# Altium PCB ee453_pcb_Schulz.PcbDoc (part 2 of 2)
Units mil, origin at the board's own origin, x right, y up, seen from the top; angles counter-clockwise.
Board outline 6000 x 5000 mil, 4 copper layers (Top Layer, PWR, GND, Bottom Layer); 112 components, 58 nets, 388 pads, 33 vias.
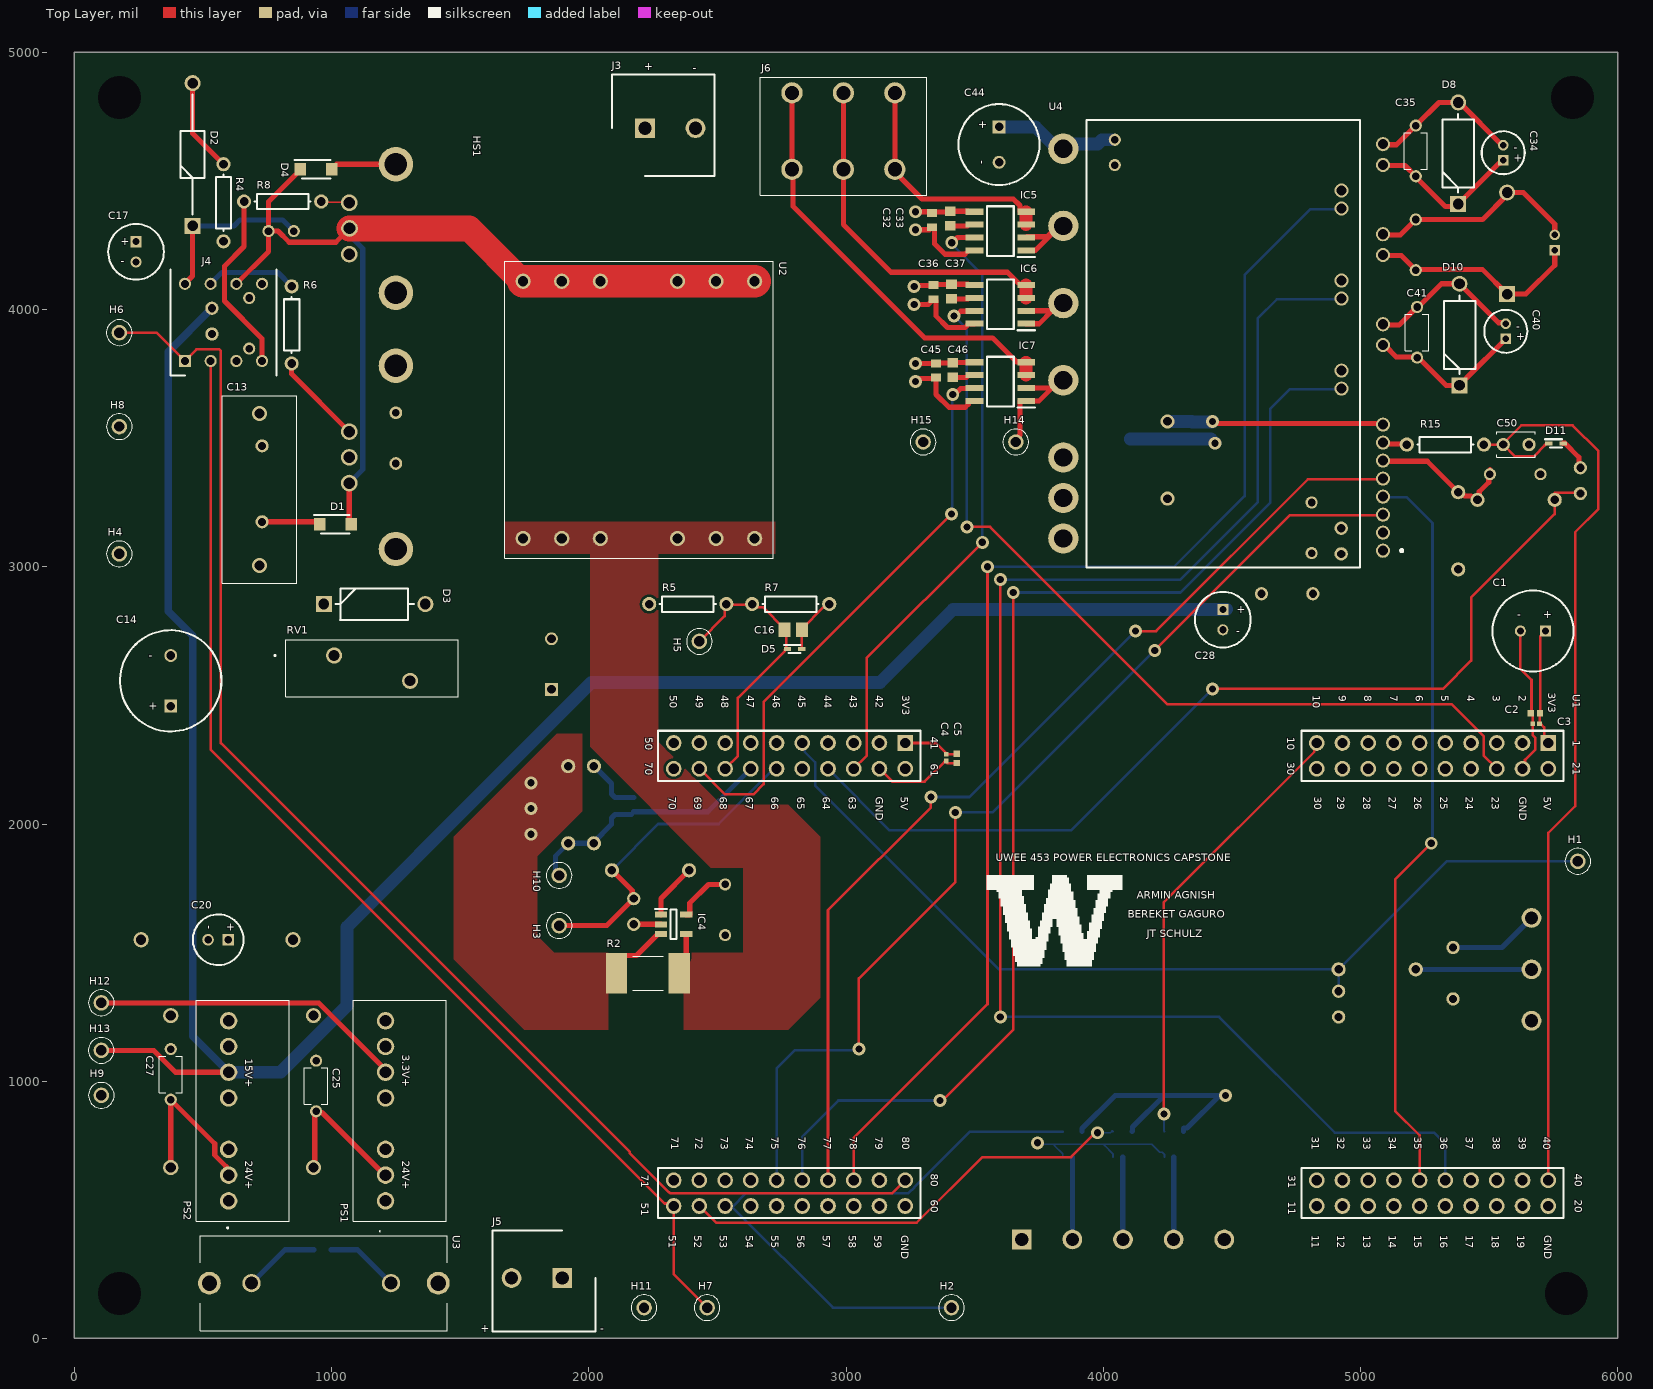
[diagram p0: Top Layer view]

## Via types
v1: diameter 50, hole 28, Top Layer to Bottom Layer, 33 vias

## Nets (pads, with @x,y where several pads share a name; then routed paths per layer and width w, separated by ;. In a path a pad name is that pad's centre, name@x,y a point inside that pad or via, vN(x,y) a via of type N, cw(c..) or ccw(c..) an arc to the next point about the centre after c; other vN are vias at no path point) (continued)
NetR15_1: (continued)
  Top Layer w7: U4.7 U4.7@5090.02,3480.02 ; R15.1@5177.5,3477.5 R15.1
  Top Layer w20: U4.7@5083.76,3477.5 R15.1@5177.5,3477.5
SD: H7.1 J4.2 U1.51 | length 4494.1
  Top Layer w10: J4.2 530,2290 2295.32,524.68 2320.32,524.68 U1.51 2330,250 H7.1
THR: C6.1 H1.1 R1.1 U1.45 | length 3705.8
  Bottom Layer w10: U1.45 2839.68,2305.32 2839.68,2280.32 2880,2240 2880,2150 3595,1435 R1.1 ; C6.1 R1.1 ; H1.1 5335,1855 R1.1
VTS: C50.1 D11.1 R15.2 U1.40 | length 3638.1
  Top Layer w10: R15.2 C50.1 ; 5717.44,3475 5717.44,3472.52 5674.01,3429.09 5600.91,3429.09 C50.1 ; U1.40 5730,1965 5835,2070 5835,3135 5925,3225 5925,3450 5825,3550 5625,3550 5555,3480 C50.1
pads on no net: H15.1 IC1.1 IC2.1 IC3.1 J2.1 PS1.3 PS1.5 PS1.8 PS2.3 PS2.5 PS2.8 U1.2 U1.3 U1.4 U1.5 U1.6 U1.7 U1.8 U1.9 U1.11 U1.12 U1.13 U1.14 U1.15 U1.16 U1.17 U1.18 U1.19 U1.21 U1.24 U1.25 U1.26 U1.27 U1.28 U1.29 U1.30 U1.31 U1.32 U1.33 U1.34 U1.37 U1.38 U1.39 U1.42 U1.43 U1.44 U1.46 U1.47 U1.48 U1.49 U1.50 U1.54 U1.55 U1.56 U1.57 U1.58 U1.59 U1.61 U1.65 U1.70 U1.71 U1.72 U1.73 U1.74 U1.79

## Polygon pours and split planes (outlines as drawn)
15V on PWR "15V_L02_P017" (solid, pour order 17): 5130,3095 5175,3050 5175,2935 4945,2705 4330,2705 4330,2902.5 4527.5,3100 4730,3100 4730,4550 4780,4600 4965,4600 5015,4550 5015,3145 5065,3095
48V on PWR "48V_L02_P022" (solid, pour order 22): 4150,4500 4095,4445 3245,4445 3165,4365 3156.16,4365 3156.16,2840 3155,2838.46 2915,2598.46 2250.39,2597.5 2000.39,2347.5 152.5,2347.5 50.39,2450 50.39,3467.5 225.39,3642.5 1305.39,3642.5 1660.39,3997.5 1660.39,4662.5 1945.39,4947.5 3975,4947.5 4150,4772.5
3.3V on PWR "3.3V_L02_P011" (solid, pour order 11): 2400,1300 2450,1350 2450,2475 2500,2525 3175,2525 3225,2575 3225,4320 3250,4345 3605,4345 3735,4215 3735,2575 3785,2525 5225,2525 5275,2575 5275,3025 5325,3075 5900,3075 5945,3030 5945,745 5900,700 2500,700 2450,750 2450,925 2400,975 1155,975 1100,1030 1100,1245 1155,1300
15V on PWR "15V_L02_P028" (solid, pour order 28): 225,4325 419,4325 419,4284 501,4284 501,4325 680,4325 780,4225 780,4095 640,3955 335,3955 175,4115 175,4275
no net on PWR "NONET_L02_P029" (solid, pour order 29): 830,4250
24V on PWR "24V_L02_P010" (solid, pour order 10): 1045,1245 1125,1325 2075,1325 2225,1475 2225,2165 2220,2170 2125,2265 2115,2275 1695,2275 1575,2155 1575,1750 320,1750 225,1655 225,1095 180,1050 70,1050 25,1005 25,355 80,300 180,300 380,100 1235,100 1300,165 1300,675 1045,930
no net on PWR "NONET_L02_P019" (solid, pour order 19): 50,3630
no net on PWR "NONET_L02_P015" (solid, pour order 15): 2450,700
no net on PWR "NONET_L02_P013" (solid, pour order 13): 1145,975
no net on PWR "NONET_L02_P012" (solid, pour order 12): 2460,700
no net on PWR "NONET_L02_P007" (solid, pour order 7): 655,780
no net on PWR "NONET_L02_P005" (solid, pour order 5): 25,1050
no net on PWR "NONET_L02_P004" (solid, pour order 4): 25,1050
no net on PWR "NONET_L02_P003" (solid, pour order 3): 50,950
no net on PWR "NONET_L02_P002" (solid, pour order 2): 40,715
24VIN on PWR "24VIN_L02_P001" (solid, pour order 1): 1325,150 1375,100 1725,100 1775,150 1775,275 1725,325 1375,325 1325,275
NetIC4_4 on Top Layer "Top Layer-NetIC4_4" (solid, pour order 48): 2370,1200 2775,1200 2900,1325 2900,1950 2775,2075 2515,2075 2270,2320 2270,3050 2725,3050 2725,3175 1675,3175 1675,3050 2005,3050 2005,2300 2475,1830 2600,1830 2600,1500 2370,1500
NetIC4_4 on Top Layer "NETIC4_4_L01_P045" (solid, pour order 45): 2520,1255
no net on Top Layer "NONET_L01_P043" (solid, pour order 43): 2040,1170
24V on Top Layer "24V_L01_P041" (solid, pour order 41): 2075,1200 1750,1200 1475,1475 1475,1950 1875,2350 1975,2350 1975,2050 1800,1875 1800,1565 1865,1500 2075,1500
no net on Top Layer "NONET_L01_P040" (solid, pour order 40): 1875,1920
no net on Top Layer "NONET_L01_P038" (solid, pour order 38): 2055,880
24V on Top Layer "24V_L01_P035" (solid, pour order 35): 1785,1505
GND on Bottom Layer "GND_L04_P050" (solid, pour order 50): 3955,3360 4145,3360 4145,4530 4085,4590 4065,4590 3940,4590 3940,3530 3955,3515
NetR11_2 on Bottom Layer "NETR11_2_L04_P049" (solid, pour order 49): 3750,3500 3925,3500 3925,3350 4300,3350 4300,3225 4094.87,3025 3750,3025
GND on GND "GND_L03_P000" (solid, pour order 0): 20,4980 5980,4980 5980,20 20,20

## Other copper
GND:
  pour cut-out: 4180,4870 4070,4980 4535,4980 4420,4865 4420,4490 4365,4430 4350,4430 4200,4430 3255,4430 3225,4400 3225,2740 2120,1635 2120,635 2505,250 2505,20 2310,20 2310,155 1810,655 1810,1605 3005,2800 3005,4315 3150,4460 4090,4460 4175,4545 4180,4545
  pour cut-out: 5980,4980 5980,4537.13 5537.13,4980
  pour cut-out: 20,4980 462.87,4980 20,4537.13
  pour cut-out: 20,20 20,462.87 462.87,20
  pour cut-out: 5512.13,20 5980,487.87 5980,20
PWR:
  pour cut-out: 597.24,4091.22

## Silkscreen, mask and mechanical layers (free items; w line width, h text height)
Top Overlay:
  region: 329 vertices and 0 holes, not listed, extent 3546.51,1447.9 4074.51,1799.9
  text "+" at 2215,4930 h30
  text "-" at 2405,4925 h30
  text "+" at 3545,4700 h30 r90
  text "-" at 5595,4615 h30
  text "+" at 5595,4575 h30
  text "-" at 3540,4565 h30 r90
  text "+" at 180,4250 h30
  text "-" at 180,4175 h30
  text "-" at 5605,3920 h30
  text "+" at 5605,3880 h30
  text "+" at 4520,2820 h30
  text "-" at 5610,2800 h30
  text "+" at 5710,2800 h30
  text "-" at 4516.39,2735.38 h30
  text "-" at 290,2640 h30
  text "+" at 290,2445 h30
  text "UWEE 453 POWER ELECTRONICS CAPSTONE" at 3582.67,1855 h30
  text "ARMIN AGNISH" at 4130.06,1710 h30
  text "BEREKET GAGURO" at 4095.07,1635 h30
  text "-" at 535,1590 h30 r90
  text "+" at 590,1585 h30
  text "JT SCHULZ" at 4170.04,1560 h30
  text "3.3V+" at 1275,1102.48 h30 r270
  text "15V+" at 665,1087.48 h30 r270
  text "24V+" at 665,689.98 h30 r270
  text "24V+" at 1275,689.98 h30 r270
  text "+" at 1580,25 h30
  text "-" at 2045,25 h30
Bottom Overlay:
  text "-" at 5795,4265 h30
  text "+" at 5795,4225 h30
  text "-" at 1765,2705 h30
  text "+" at 1765,2510 h30
  text "+" at 5565,1620 h30
  text "-" at 5585,1250 h30 r180
  text "B" at 4090,90 h30 r180
  text "C" at 4280,90 h30 r180
  text "A" at 3870,60 h30
  text "-" at 4460,60 h30

## Text inside footprints (layer, text, board x,y; h text height)
U1: Top Overlay "78" at 3013.66,785.15 h30 r270; Top Overlay "79" at 3113.66,785.15 h30 r270; Top Overlay "39" at 5615,785.15 h30 r270; Top Overlay "38" at 5515,785.15 h30 r270; Top Overlay "27" at 5110,2106.57 h30 r270; Top Overlay "19" at 5610,401.85 h30 r270; Top Overlay "59" at 3110,401.85 h30 r270; Top Overlay "11" at 4810,401.85 h30 r270; Top Overlay "12" at 4910,401.85 h30 r270; Top Overlay "13" at 5010,401.85 h30 r270; Top Overlay "15" at 5210,401.85 h30 r270; Top Overlay "16" at 5310,401.85 h30 r270; Top Overlay "17" at 5410,401.85 h30 r270; Top Overlay "18" at 5510,401.85 h30 r270; Top Overlay "31" at 4810,785.15 h30 r270; Top Overlay "32" at 4910,785.15 h30 r270; Top Overlay "33" at 5010,785.15 h30 r270; Top Overlay "34" at 5110,785.15 h30 r270; Top Overlay "35" at 5210,785.15 h30 r270; Top Overlay "36" at 5310,785.15 h30 r270; Top Overlay "37" at 5410,785.15 h30 r270; Top Overlay "14" at 5110,401.85 h30 r270; Top Overlay "51" at 2310,401.85 h30 r270; Top Overlay "52" at 2410,401.85 h30 r270; Top Overlay "53" at 2510,401.85 h30 r270; Top Overlay "55" at 2710,401.85 h30 r270; Top Overlay "56" at 2810,401.85 h30 r270; Top Overlay "57" at 2910,401.85 h30 r270; Top Overlay "58" at 3010,401.85 h30 r270; Top Overlay "80" at 3218.66,785.15 h30 r270; Top Overlay "72" at 2413.66,785.15 h30 r270; Top Overlay "73" at 2513.66,785.15 h30 r270; Top Overlay "74" at 2610,785.15 h30 r270; Top Overlay "75" at 2710,785.15 h30 r270; Top Overlay "76" at 2813.66,785.15 h30 r270; Top Overlay "77" at 2913.66,785.15 h30 r270; Top Overlay "54" at 2610,401.85 h30 r270; Top Overlay "67" at 2610,2106.57 h30 r270; Top Overlay "42" at 3115,2499.95 h30 r270; Top Overlay "43" at 3015,2499.95 h30 r270; Top Overlay "44" at 2915,2499.95 h30 r270; Top Overlay "45" at 2815,2499.95 h30 r270; Top Overlay "46" at 2715,2499.95 h30 r270; Top Overlay "47" at 2615,2499.95 h30 r270; Top Overlay "48" at 2515,2499.95 h30 r270; Top Overlay "49" at 2415,2499.95 h30 r270; Top Overlay "50" at 2315,2499.95 h30 r270; Top Overlay "63" at 3010,2106.57 h30 r270; Top Overlay "64" at 2910,2106.57 h30 r270; Top Overlay "65" at 2810,2106.57 h30 r270; Top Overlay "66" at 2710,2106.57 h30 r270; Top Overlay "68" at 2510,2106.57 h30 r270; Top Overlay "69" at 2410,2106.57 h30 r270; Top Overlay "70" at 2310,2106.57 h30 r270; Top Overlay "30" at 4820,2106.57 h30 r270; Top Overlay "29" at 4910,2106.57 h30 r270; Top Overlay "28" at 5010,2106.57 h30 r270; Top Overlay "26" at 5210,2106.57 h30 r270; Top Overlay "25" at 5310,2106.57 h30 r270; Top Overlay "24" at 5410,2106.57 h30 r270; Top Overlay "23" at 5510,2106.57 h30 r270; Top Overlay "10" at 4815,2499.95 h30 r270; Top Overlay "9" at 4915,2499.95 h30 r270; Top Overlay "8" at 5015,2499.95 h30 r270; Top Overlay "7" at 5115,2499.95 h30 r270; Top Overlay "6" at 5215,2499.95 h30 r270; Top Overlay "5" at 5315,2499.95 h30 r270; Top Overlay "4" at 5415,2499.95 h30 r270; Top Overlay "3" at 5515,2499.95 h30 r270; Top Overlay "2" at 5615,2499.95 h30 r270; Top Overlay "41" at 3330,2340 h30 r270; Top Overlay "61" at 3330,2235 h30 r270; Top Overlay "50" at 2220,2337 h30 r270; Top Overlay "70" at 2220,2240 h30 r270; Top Overlay "60" at 3330,540 h30 r270; Top Overlay "80" at 3330,640 h30 r270; Top Overlay "71" at 2320,785.15 h30 r270; Top Overlay "10" at 4715,2337 h30 r270; Top Overlay "1" at 5825,2325 h30 r270; Top Overlay "30" at 4715,2240 h30 r270; Top Overlay "21" at 5825,2240 h30 r270; Top Overlay "20" at 5833.05,540 h30 r270; Top Overlay "11" at 4720,532 h30 r270; Top Overlay "31" at 4720,635 h30 r270; Top Overlay "40" at 5833.05,640 h30 r270; Top Overlay "GND" at 5715,401.85 h30 r270; Top Overlay "GND" at 5616.45,2106.57 h30 r270; Top Overlay "5V" at 5713.05,2106.57 h30 r270; Top Overlay "3V3" at 5730,2510 h30 r270; Top Overlay "5V" at 3213.05,2106.57 h30 r270; Top Overlay "GND" at 3116.45,2106.57 h30 r270; Top Overlay "3V3" at 3218.05,2499.95 h30 r270; Top Overlay "GND" at 3215,401.85 h30 r270; Top Overlay "40" at 5710,785.15 h30 r270; Top Overlay "71" at 2203.46,637.38 h30 r270; Top Overlay "51" at 2205,526.85 h30 r270; Bottom Overlay "AB2/G1I" at 5120,1953.46 h25 r270; Bottom Overlay "AC0/G3I" at 5015,1949.29 h25 r270; Bottom Overlay "AA9/G5I" at 4920,1949.29 h25 r270; Bottom Overlay "AA1/DACB" at 4760,1925 h30 r270; Bottom Overlay "AA8/G6O" at 2515,2394.33 h25 r270; Bottom Overlay "AA4/G2O" at 2715,2394.33 h25 r270; Bottom Overlay "AB4/G4O" at 2820,2394.33 h25 r270; Bottom Overlay "AC4" at 5015,2419.97 h30 r270; Bottom Overlay "AB3" at 5215,2419.97 h30 r270; Bottom Overlay "NC" at 5315,2449.96 h30 r270; Bottom Overlay "AA5" at 5510,2026.6 h30 r270; Bottom Overlay "AB0" at 5410,2026.6 h30 r270; Bottom Overlay "AC2" at 5310,2026.6 h30 r270; Bottom Overlay "AB1" at 5210,2036.6 h30 r270; Bottom Overlay "PGAGND" at 5610,2390 h30 r270; Bottom Overlay "P13" at 5515,2424.97 h30 r270; Bottom Overlay "P40" at 5415,2419.97 h30 r270; Bottom Overlay "P56" at 5115,2419.97 h30 r270; Bottom Overlay "P37" at 4915,2419.97 h30 r270; Bottom Overlay "P35" at 4815,2419.97 h30 r270; Bottom Overlay "NC" at 2315,2449.96 h30 r270; Bottom Overlay "NC" at 2415,2449.96 h30 r270; Bottom Overlay "P22" at 2615,2419.97 h30 r270; Bottom Overlay "P29" at 2915,2419.97 h30 r270; Bottom Overlay "P28" at 3015,2419.97 h30 r270; Bottom Overlay "PGAGND" at 3110,2390 h30 r270; Bottom Overlay "AA0/DACA" at 2310,1915 h30 r270; Bottom Overlay "AC1" at 2710,2036.6 h30 r270; Bottom Overlay "AA6" at 3010,2026.6 h30 r270; Bottom Overlay "P27" at 3110,321.88 h30 r270; Bottom Overlay "NC" at 3010,351.87 h30 r270; Bottom Overlay "NC" at 2910,351.87 h30 r270; Bottom Overlay "XRSn" at 2810,321.88 h30 r270; Bottom Overlay "P24" at 2710,321.88 h30 r270; Bottom Overlay "P31" at 2610,321.88 h30 r270; Bottom Overlay "P33" at 2510,321.88 h30 r270; Bottom Overlay "P34" at 2410,321.88 h30 r270; Bottom Overlay "P12" at 2310,321.88 h30 r270; Bottom Overlay "P00" at 3218.66,705.17 h30 r270; Bottom Overlay "P01" at 3113.66,715.17 h30 r270; Bottom Overlay "P06" at 3013.66,705.17 h30 r270; Bottom Overlay "P07" at 2908.66,705.17 h30 r270; Bottom Overlay "P02" at 2813.66,705.17 h30 r270; Bottom Overlay "P03" at 2713.66,705.17 h30 r270; Bottom Overlay "P26" at 2613.66,705.17 h30 r270; Bottom Overlay "P15" at 2513.66,710.17 h30 r270; Bottom Overlay "P14" at 2413.66,710.17 h30 r270; Bottom Overlay "P25" at 4810,705.17 h30 r270; Bottom Overlay "P18" at 4910,710.17 h30 r270; Bottom Overlay "P30" at 5010,705.17 h30 r270; Bottom Overlay "P58" at 5110,705.17 h30 r270; Bottom Overlay "P05" at 5210,705.17 h30 r270; Bottom Overlay "P04" at 5310,705.17 h30 r270; Bottom Overlay "P09" at 5410,705.17 h30 r270; Bottom Overlay "P08" at 5515,705.17 h30 r270; Bottom Overlay "P11" at 5615,720.17 h30 r270; Bottom Overlay "P10" at 5710,710.17 h30 r270; Bottom Overlay "P59" at 4810,321.88 h30 r270; Bottom Overlay "P23" at 4910,321.88 h30 r270; Bottom Overlay "P39" at 5010,321.88 h30 r270; Bottom Overlay "P17" at 5110,321.88 h30 r270; Bottom Overlay "P16" at 5210,321.88 h30 r270; Bottom Overlay "XRSn" at 5310,321.88 h30 r270; Bottom Overlay "NC" at 5410,351.87 h30 r270; Bottom Overlay "NC" at 5515,351.87 h30 r270; Bottom Overlay "P57" at 5610,321.88 h30 r270; Bottom Overlay "60" at 3330,485 h30 r270; Bottom Overlay "80" at 3330,595 h30 r270; Bottom Overlay "71" at 2320,745.16 h30 r270; Bottom Overlay "41" at 3330,2285 h30 r270; Bottom Overlay "61" at 3330,2195 h30 r270; Bottom Overlay "50" at 2220,2295 h30 r270; Bottom Overlay "70" at 2220,2195 h30 r270; Bottom Overlay "31" at 4720,595 h30 r270; Bottom Overlay "11" at 4720,495 h30 r270; Bottom Overlay "40" at 5833.05,585 h30 r270; Bottom Overlay "20" at 5833.05,490 h30 r270; Bottom Overlay "30" at 4715,2185 h30 r270; Bottom Overlay "10" at 4715,2295 h30 r270; Bottom Overlay "21" at 5825,2200 h30 r270; Bottom Overlay "1" at 5825,2310 h30 r270; Bottom Overlay "GND" at 3115,2026.6 h30 r270; Bottom Overlay "5V" at 3213.05,2056.59 h30 r270; Bottom Overlay "3V3" at 3220,2419.97 h30 r270; Bottom Overlay "GND" at 5615,2026.6 h30 r270; Bottom Overlay "5V" at 5713.05,2056.59 h30 r270; Bottom Overlay "3V3" at 5720,2419.97 h30 r270; Bottom Overlay "GND" at 5718.05,321.88 h30 r270; Bottom Overlay "GND" at 3213.05,321.88 h30 r270; Bottom Overlay "71" at 2203.46,597.39 h30 r270; Bottom Overlay "P12" at 2205,446.88 h30 r270